# Altium PCB CH32F103R-R0-1v1.PcbDoc
Units mm, origin at the board's own origin, x right, y up, seen from the top; angles counter-clockwise.
Board outline 45.75 x 56.34 mm, 2 copper layers (TopLayer, BottomLayer); 41 components, 71 nets, 238 pads, 159 vias.
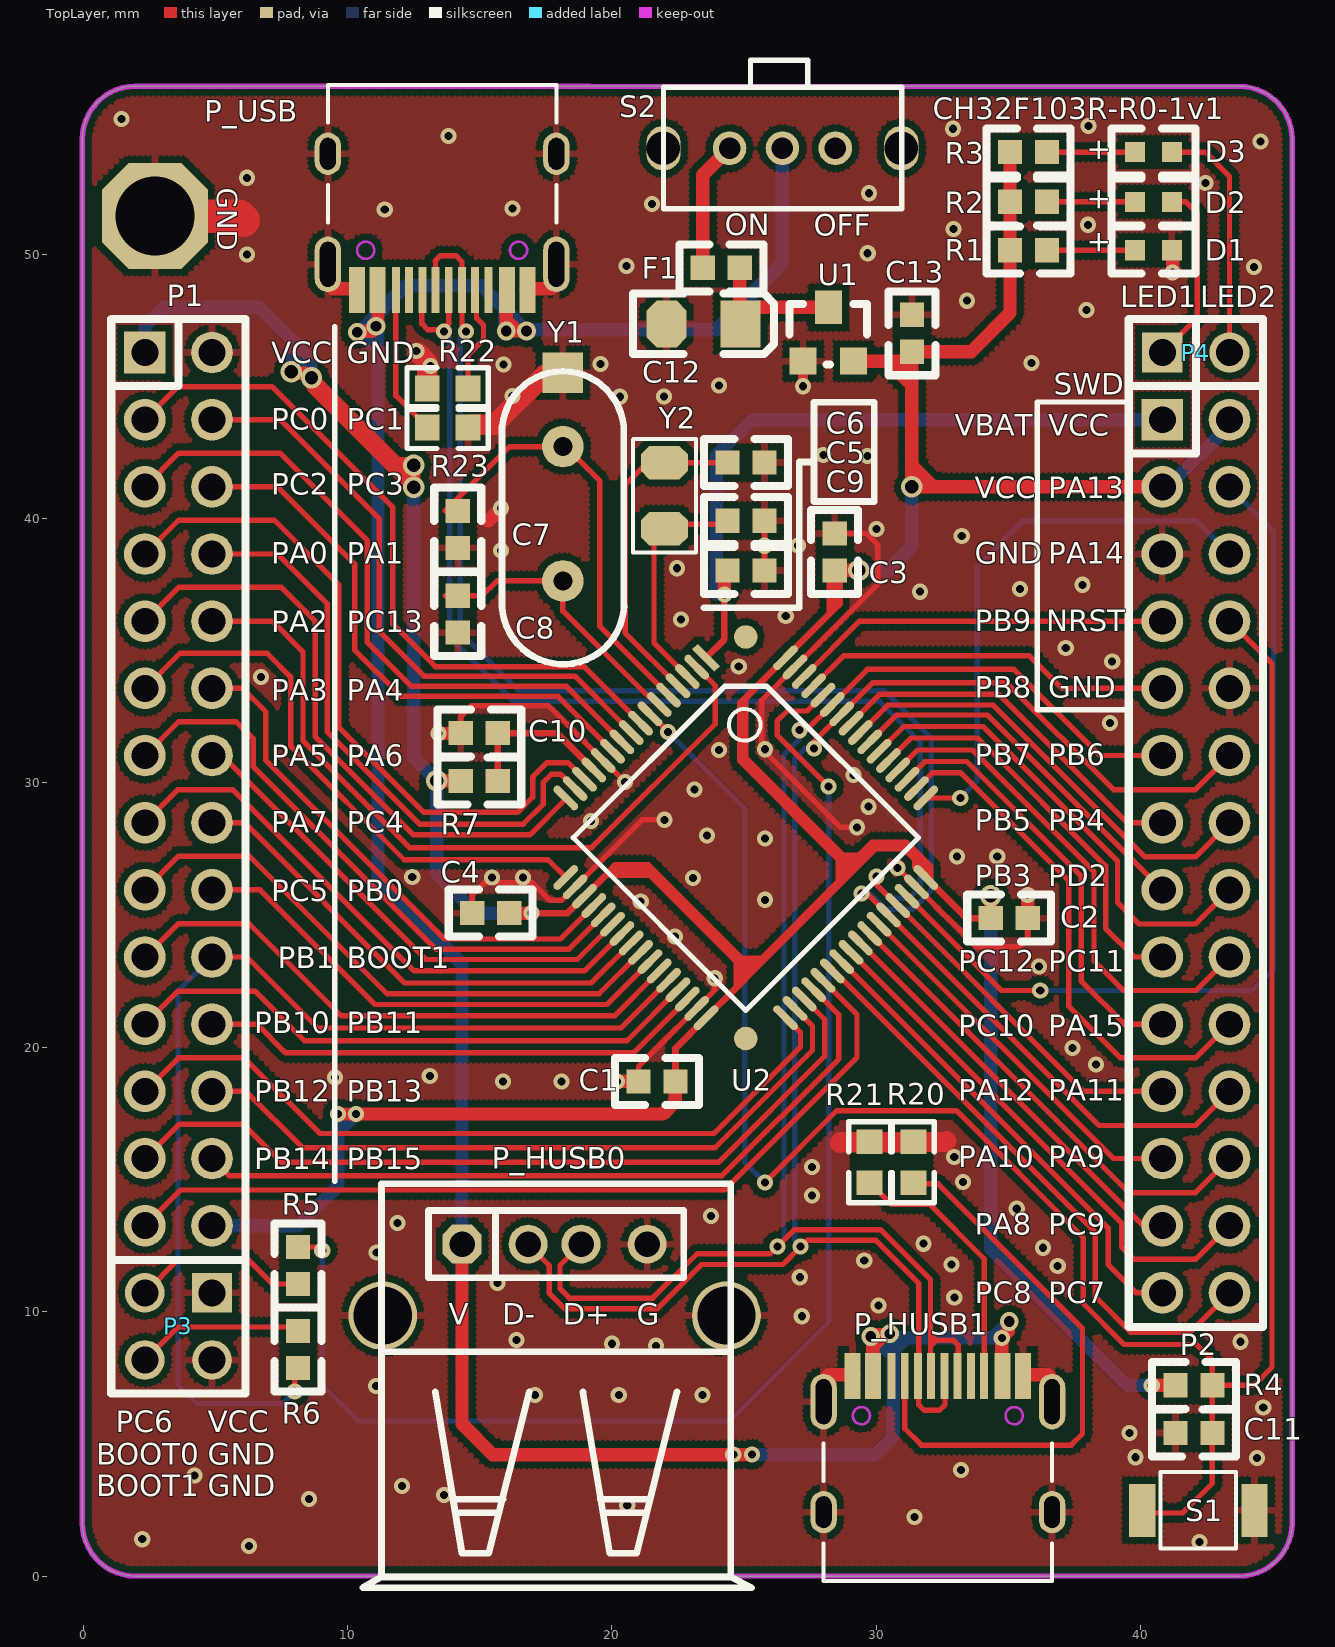
[diagram p0: TopLayer view]
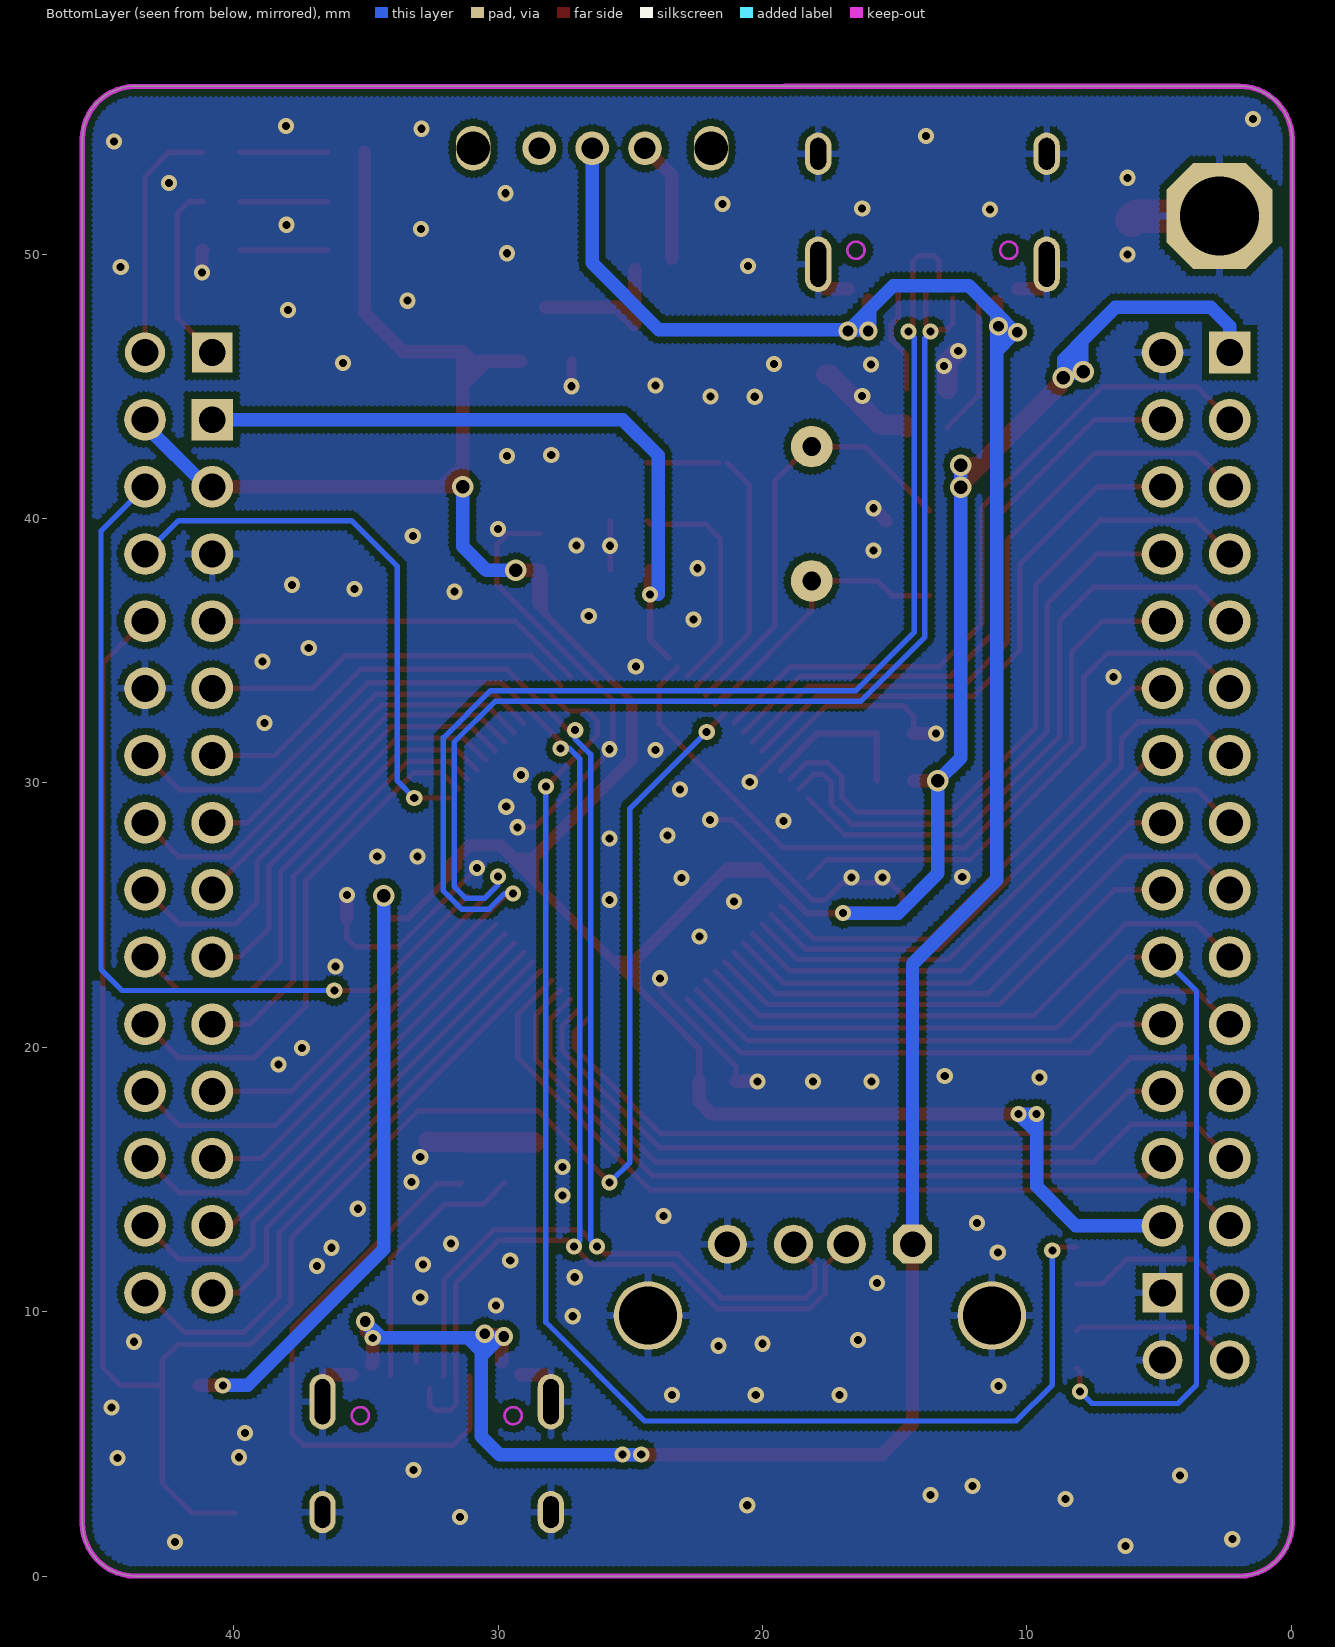
[diagram p1: BottomLayer view, seen from below]

## Layer stack, top to bottom
TopSolder: solder mask 0.0102, Solder Resist, Dk 3.5
TopLayer: signal copper 0.0356
Dielectric1: dielectric 0.32, FR-4, Dk 4.8
BottomLayer: signal copper 0.0356
BottomSolder: solder mask 0.0102, Solder Resist, Dk 3.5

## Board outline
-0.03,2.005 -0.03,54.346 cw(c1.97,54.346) 1.97,56.346 43.724,56.346 43.729,56.346 cw(c43.729,54.352) 45.723,54.352 45.723,2.005 cw(c43.723,2.005) 43.723,0.005 1.97,0.005 cw(c1.97,2.005)

## Design rules (kind name [scope] priority, off if disabled: settings)
Clearance Clearance_1 [InPolygon] p1: gap=0.254 ignorepadtopadclearanceinfootprint=FALSE
Clearance [All] p2: gap=0.152 ignorepadtopadclearanceinfootprint=FALSE
ComponentClearance [All] p1 off: gap=0.254 collisioncheckmode=3 verticalgap=0.254 showdistances=FALSE
DiffPairsRouting [All] p1: maxlimit=0.254 minlimit=0.178 mostfreqgap=0.203 toplayer_minwidth=0.152 toplayer_maxwidth=0.381 toplayer_prefwidth=0.203 bottomlayer_minwidth=0.152 bottomlayer_maxwidth=0.381 bottomlayer_prefwidth=0.203 maxuncoupledlength=12.7
MinimumSolderMaskSliver [All] p1 off: minsoldermaskwidth=0.254
PolygonConnect PolygonConnect_1 [IsVia] p1: connectstyle=Direct reliefconductorwidth=0.254 reliefentries=4 polygonreliefangle="90 Angle" airgapwidth=0.254
PolygonConnect [All] p2: connectstyle=Relief reliefconductorwidth=0.254 reliefentries=4 polygonreliefangle="90 Angle" airgapwidth=0.254
RoutingVias [All] p1: holewidth=0.406 width=0.711 viastyle="Through Hole" minholewidth=0.305 minwidth=0.61 maxholewidth=0.711 maxwidth=1.27
SilkToSilkClearance [All] p1 off: silktosilkclearance=0.254
SilkToSolderMaskClearance [IsPad] p1 off: minsilkscreentomaskgap=0.254 clearancetoexposedcopper=TRUE
SolderMaskExpansion [All] p1: expansion=0.102 istentingtop=FALSE
Width [All] p1: maxlimit=2.54 minlimit=0.152 preferedwidth=0.254
25 further rules are at their usual default settings.

## Classes and differential pairs
differential pair NewDifferentialPair2: +PA11 -PA12
differential pair NewDifferentialPair1: +PB6 -PB7

## Components (designator, comment, footprint, x,y, rotation, side; value= is the part's Value field where it differs from the comment)
C1 "0.1uF" 0603#1 21.001,18.71 r0 top value=15pF
C2 "0.1uF" 0603#1 35.721,24.885 r180 top value=15pF
C3 "0.1uF" 0603#1 28.421,39.432 r270 top value=15pF
C4 "0.1uF" 0603#1 14.715,25.073 r0 top value=15pF
C5 "12pF" 0603#1 24.369,39.914 r0 top
C6 "12pF" 0603#1 24.369,42.112 r0 top
C7 "22pF" 0603#1 14.167,38.887 r90 top
C8 "22pF" 0603#1 14.167,35.682 r90 top
C9 "0.1uF" 0603#1 24.369,38.035 r0 top value=15pF
C10 "0.1uF" 0603#1 15.68,31.88 r180 top value=15pF
C11 "0.1uF" 0603#1 41.309,5.413 r0 top
C12 "10uF" 3216 24.858,47.357 r0 top
C13 "2.2uF" 0603#1 31.344,46.304 r90 top
D1 "POWER  red" 0603L 39.776,50.145 r0 top
D2 "LED1   blue" 0603L 39.776,51.973 r0 top
D3 "LED2  blue" 0603L 39.776,53.853 r0 top
F1 "500mA" 0603#1 23.435,49.478 r0 top
P1 "Header 14X2A" IDC28A 2.333,46.274 r0 top
P2 "Header 14X2A" IDC28A 40.813,43.734 r0 top
P3 "Header 2X2" HDR2X2 4.874,10.714 r180 top
P4 "2HEAD" "SIP2 - 40mil" 40.813,46.274 r0 top
P_HUSB0 "USB_A" USBA-l 14.328,12.555 r0 top
P_HUSB1 "TYPE-C" TYPE-C-Receptacle-2.0 32.322,7.569 r0 top
P_USB "TYPE-C" TYPE-C-Receptacle-2.0 13.576,48.641 r180 top
R1 "1K" 0603#1 36.449,50.145 r180 top
R2 "1K" 0603#1 35.052,51.973 r0 top
R3 "1K" 0603#1 35.052,53.853 r0 top
R4 "10K" 0603#1 42.706,7.217 r180 top
R5 "10K" 0603#1 8.128,12.446 r270 top
R6 "10K" 0603#1 8.128,7.874 r90 top
R7 "0Ω" 0603#1 14.283,30.077 r0 top value=10K
R20 "NC(5.1K)" 0603#2 31.394,14.884 r90 top
R21 "NC(5.1K)" 0603#2 29.743,14.884 r90 top
R22 "NC(5.1K)" 0603#2 14.554,44.907 r180 top
R23 "NC(5.1K)" 0603#2 13.014,43.434 r0 top
S1 "KEY" 贴片按键 40.056,2.489 r0 top
S2 "SW" KEY2 30.446,53.999 r180 top
U1 "6219P33M" "SOT-23 - IC" 27.229,45.949 r0 top
U2 "CH32F103R" LQFP64M_10X10 23.556,34.733 r225 top locked
Y1 "8M" XT62/28 18.142,37.638 r0 top
Y2 "32.768k" FC-135 21.981,39.61 r90 top

## Footprints (in the part's own frame and the unit in brackets; to place one, negate y for a bottom-side part, rotate by r counter-clockwise, add the part's x,y. Pads: shape width x height; smd on the part's side, far side on the other; paste and mask are expansions set on the pad)
0603#1 [mil]
  rect 36x36 smd: 1(0,0) 2(55,0)
  silkscreen extent -35,-35 90,35
0603#2 [mil]
  rect 36.61x38.58 smd: 1(0,0) 2(60.63,0)
  silkscreen extent -30,-31 91,31
0603L [mil]
  rect 30x30 smd: 1(0,0) 2(55,0)
  silkscreen extent -35,-35 90,35
3216 [mil]
  rect 60x70 smd: 1(0,0)
  oct 60x70 smd: 2(-110,0)
  silkscreen extent -160,-45 50,45
FC-135 [mil]
  oct 50x70 smd: 1(0,0) 2(98.43,0)
  silkscreen extent -35,-47 133,47
HDR2X2 [mm] "Connector; Header; 2x2 Position"
  rect 1.5x1.5 hole 1.016: 1(0,0)
  round 1.5 hole 1.016: 2(0,2.54) 3(2.54,0) 4(2.54,2.54)
  silkscreen extent -1.27,-1.27 3.81,3.81
IDC28A [mil]
  rect 62x62 hole 40: 1(0,0)
  round 62 hole 40: 2(0,-100) 3(0,-200) 4(0,-300) 5(0,-400) 6(0,-500) 7(0,-600) 8(0,-700) 9(0,-800) 10(0,-900) 11(0,-1000) 12(0,-1100) 13(0,-1200) 14(0,-1300) 15(100,0) 16(100,-100) 17(100,-200) 18(100,-300) 19(100,-400) 20(100,-500) 21(100,-600) 22(100,-700) 23(100,-800) 24(100,-900) 25(100,-1000) 26(100,-1100) 27(100,-1200) 28(100,-1300)
  silkscreen extent -50,-1351 150,50
KEY2 [mm]
  oval 1.3x1.7 hole 1.27: 0(-0.5,0) 0(8.5,0)
  round 1.27 hole 0.813: 1(4,0) 2(2,0) 3(6,0)
  silkscreen extent -0.51,-3.32 8.5,2.29
LQFP64M_10X10 [mm]
  round 0.889 smd: 0(-1.619,0.508) 0(9.119,11.246)
  rect 0.3x1.2 smd: 1(0,0)
  oval 0.3x1.2 smd: 2(0.5,0) 3(1,0) 4(1.5,0) 5(2,0) 6(2.5,0) 7(3,0) 8(3.5,0) 9(4,0) 10(4.5,0) 11(5,0) 12(5.5,0) 13(6,0) 14(6.5,0) 15(7,0) 16(7.5,0) 33(7.5,11.754) 34(7,11.754) 35(6.5,11.754) 36(6,11.754) 37(5.5,11.754) 38(5,11.754) 39(4.5,11.754) 40(4,11.754) 41(3.5,11.754) 42(3,11.754) 43(2.5,11.754) 44(2,11.754) 45(1.5,11.754) 46(1,11.754) 47(0.5,11.754) 48(0,11.754)
  oval 1.2x0.3 smd: 17(9.627,2.127) 18(9.627,2.627) 19(9.627,3.127) 20(9.627,3.627) 21(9.627,4.127) 22(9.627,4.627) 23(9.627,5.127) 24(9.627,5.627) 25(9.627,6.127) 26(9.627,6.627) 27(9.627,7.127) 28(9.627,7.627) 29(9.627,8.127) 30(9.627,8.627) 31(9.627,9.127) 32(9.627,9.627) 49(-2.127,9.627) 50(-2.127,9.127) 51(-2.127,8.627) 52(-2.127,8.127) 53(-2.127,7.627) 54(-2.127,7.127) 55(-2.127,6.627) 56(-2.127,6.127) 57(-2.127,5.627) 58(-2.127,5.127) 59(-2.127,4.627) 60(-2.127,4.127) 61(-2.127,3.627) 62(-2.127,3.127) 63(-2.127,2.627) 64(-2.127,2.127)
  silkscreen extent -0.86,1.26 8.37,10.49
"SIP2 - 40mil" [mil]
  rect 60x60 hole 40: 1(0,0)
  round 60 hole 40: 2(100,0)
  silkscreen extent -50,-50 150,50
"SOT-23 - IC" [mil]
  rect 40x40 smd: 1(0,0) 2(75,0)
  rect 40x50 smd: 3(38,80)
  silkscreen extent -20,-5 95,85
TYPE-C-Receptacle-2.0 [mm]
  oval 1x1.6 hole 0.6 slot 1.2 at 90 deg: 0(-4.32,-5.15) 0(4.32,-5.15)
  oval 1x2.1 hole 0.6 slot 1.7 at 90 deg: 0(-4.32,-0.97) 0(4.32,-0.97)
  rect 0.6x1.75 smd: A1(-3.225,0) A4(-2.45,0) B1(3.225,0) B4(2.45,0)
  rect 0.3x1.75 smd: A5(-1.25,0) A6(-0.25,0) A7(0.25,0) A8(1.25,0) B5(1.75,0) B6(0.75,0) B7(-0.75,0) B8(-1.75,0)
  KeepOutLayer circle w0.1: c2.89,-1.5 r0.325
  KeepOutLayer circle w0.1: c-2.89,-1.5 r0.325
  silkscreen extent -4.32,-7.75 4.32,-2.55
USBA-l [mm]
  oct 1.473x1.473 hole 0.965: 1(0,0)
  round 1.473 hole 0.965: 2(2.5,0) 3(4.5,0) 4(7,0)
  round 2.6 hole 2.2: 5(-3,-2.7) 6(10,-2.7)
  silkscreen extent -3.75,-12.99 10.95,2.29
XT62/28 [mil]
  rect 60x60 smd: 0(0,310)
  round 62 hole 28: 1(0,0) 2(0,200)
  silkscreen extent -91,-124 91,312
贴片按键 [mm]
  rect 1x2 smd: 1(0,0) 3(4.242,0)
  silkscreen extent 0.69,-1.45 3.55,1.45

## Part data
C1 C2 C3 C4 C5 C6 C7 C8 C9 C10 C11: library part Cap, "Capacitor", LatestRevisionDate=17-Jul-2002, LatestRevisionNote="Re-released for DXP Platform.", PackageReference=RAD-0.3, Published=8-Jun-2000, Publisher="Altium Limited"
C12 C13: library part CAP, "Capacitor"
D1 D2 D3: library part LED0, "Typical INFRARED GaAs LED", LatestRevisionDate=08-Jul-2005, LatestRevisionNote="Mech Layer 1 removed.", PackageReference=LED-0, Published=8-Jun-2000, Publisher="Altium Limited"
F1: library part FUSE1, "Fuse"
P1 P2: "Header, 14-Pin, Dual row", LatestRevisionDate=17-Jul-2002, LatestRevisionNote="Re-released for DXP Platform.", Publisher="Altium Limited"
P3: "Header, 2-Pin, Dual row", LatestRevisionDate=17-Jul-2002, LatestRevisionNote="Re-released for DXP Platform.", Publisher="Altium Limited"
P_HUSB0: library part USB, "USB Port"
P_HUSB1 P_USB: library part TYPE-C1
R1 R2 R3: library part "Res Semi", "Semiconductor Resistor", LatestRevisionDate=17-Jul-2002, LatestRevisionNote="Re-released for DXP Platform.", PackageReference=AXIAL-0.5, Published=8-Jun-2000, Publisher="Altium Limited"
R4 R5 R6 R7 R20 R21 R22 R23: library part Res2, "Resistor"
  R4 R5 R6 R7: LatestRevisionDate=17-Jul-2002, LatestRevisionNote="Re-released for DXP Platform.", PackageReference=AXIAL-0.4, Published=8-Jun-2000, Publisher="Altium Limited"
U2: "ARM M3 MCU with USB device & USB host & ADC & 12bit DAC & Touch Key & CAN"
Y1 Y2: library part XTAL, "Crystal Oscillator", LatestRevisionDate=17-Jul-2002, LatestRevisionNote="Re-released for DXP Platform.", PackageReference=R38, Published=8-Jun-2000, Publisher="Altium Limited"

## Free pads (board coordinates)
  oct 4x4 hole 3: 0(2.718,51.435)

## Via types
v1: diameter 0.61, hole 0.305, TopLayer to BottomLayer, tented both sides, 144 vias
v2: diameter 0.813, hole 0.508, TopLayer to BottomLayer, tented both sides, 8 vias
v3: diameter 0.711, hole 0.406, TopLayer to BottomLayer, tented both sides, 7 vias

## Nets (pads, with @x,y where several pads share a name; then routed paths per layer and width w, separated by ;. In a path a pad name is that pad's centre, name@x,y a point inside that pad or via, vN(x,y) a via of type N, cw(c..) or ccw(c..) an arc to the next point about the centre after c; other vN are vias at no path point)
+5V: P_HUSB0.1 P_HUSB1.A4 P_HUSB1.B4 P_USB.A4 P_USB.B4 S2.1 | length 107.6
  TopLayer w0.508: v3@10.439,47.041 10.478,47.08 10.933,47.08 11.123,47.269 11.151,47.269 11.151,48.199 P_USB.B4@11.157,48.205 ; P_HUSB0.1 14.328,5.763 15.494,4.597 v1(24.587,4.597) v1(25.298,4.597) ; P_USB.A4@16.007,48.256 16.007,47.498 ; v3@16.713,47.092 v3@16.414,47.092 ; P_HUSB1.A4@29.865,8.106 29.865,8.701 ; v3(30.505,9.169) 30.467,9.131 29.984,9.131 29.955,9.101 29.883,9.101 29.865,9.084 v3@29.865,9.012 ; P_HUSB1.B4@34.792,8.005 34.741,8.056 v1(34.741,9.012) 34.988,9.258 34.988,9.588 v3(35.027,9.627) ; 16.007,47.498 v3@16.414,47.092 ; 16.007,47.498 16.007,47.097 v3(16.002,47.092) v3@16.414,47.092 ; 29.865,8.701 30.175,9.012 v3@29.865,9.012 ; 29.865,8.701 v3@29.865,9.012
  BottomLayer w0.508: P_HUSB0.1 14.328,23.148 11.151,26.326 11.151,46.33 ; v1(24.587,4.597) v1(25.298,4.597) 29.947,4.597 30.632,5.283 30.632,8.32 ; S2.1 26.446,49.661 23.927,47.142 v3@16.713,47.142 ; v3@10.439,47.041 10.494,47.041 v3@10.533,47.002 ; v3@10.439,47.041 11.151,47.752 ; v3@10.439,47.041 v3@10.478,47.002 ; v3@10.478,47.002 v3@10.533,47.002 ; v3@10.478,47.002 11.151,46.33 ; v3@10.533,47.002 10.85,46.685 11.151,46.685 ; v3@10.533,47.002 11.126,47.002 v3@11.151,46.977 ; 11.151,46.33 11.151,46.685 ; 11.151,46.685 v3@11.151,46.977 ; v3@11.151,46.977 11.151,47.269 11.151,47.752 ; 11.151,47.752 12.192,48.793 15.062,48.793 15.951,47.904 ; 15.951,47.904 v3@16.713,47.142 ; 15.951,47.904 15.951,47.142 v3@16.713,47.142 ; 30.632,8.32 30.632,8.504 31.14,9.012 ; 30.632,8.32 29.941,9.012 31.14,9.012 ; 31.14,9.012 34.412,9.012 ; 34.412,9.012 v1(34.741,9.012) 34.761,9.031 34.761,9.306 35.027,9.572 v3(35.027,9.627) 34.412,9.012
  other v3: 29.789,9.062 10.363,47.041 16.764,47.092 11.074,47.269
BOOT0: R5.1 U2.60 | length 53
  TopLayer w0.203: R5.1 8.915,12.446 v1(9.042,12.319) ; U2.60 27.378,32.718 26.628,32.718 26.247,32.337 26.247,31.804 v1(28.194,29.856)
  BottomLayer w0.203: v1(9.042,12.319) 9.042,7.233 10.408,5.867 24.46,5.867 28.194,9.601 v1(28.194,29.856)
BOOT1: P1.24 R6.1 U2.28 | length 41.7
  TopLayer w0.203: P1.24 6.188,23.414 8.873,20.729 20.339,20.729 U2.28 ; v1(8.001,6.985) 8.001,7.747 R6.1
  BottomLayer w0.203: P1.24 3.59,22.131 3.59,7.231 4.293,6.528 7.544,6.528 v1(8.001,6.985)
GND: C1.1 C2.1 C3.1 C4.1 C5.2 C6.2 C7.1 C8.1 C9.2 C10.2 C11.1 C12.2 C13.2 D1.2 P1.15 P2.3 P2.19 P3.1 P3.2 P_HUSB0.4 P_HUSB0.5 P_HUSB0.6 P_HUSB1.0 P_HUSB1.A1 P_HUSB1.B1 P_USB.0 P_USB.A1 P_USB.B1 pad.0 R20.2 R21.2 R22.2 R23.2 S1.3 U1.1 U2.12 U2.18 U2.31 U2.47 U2.63 Y1.0 | length 72.7
  TopLayer w0.203: C10.2 14.283,32.515 14.69,32.921 17.589,32.921 U2.12 v1(20.485,30.026) ; C4.1 14.715,25.759 15.172,26.216 17.001,26.216 17.661,25.555 18.094,25.555 U2.18 21.142,28.603 v1(21.979,28.603) ; C1.1 21.001,19.271 U2.31 23.884,22.154 v1(23.884,22.609) ; C9.2 C5.2 ; C3.1 29.631,39.432 30.048,39.014 30.048,37.51 U2.63 25.662,33.124 25.662,31.296 28.638,28.32 v1(29.261,28.32) v1@29.062,28.32 ; v1(30.793,26.775) 30.807,26.775 U2.47 33.777,23.804 35.403,23.804 35.721,24.122 C2.1
  TopLayer w0.381: v1(27.229,45) U1.1
  TopLayer w0.508: P_USB.0@9.232,48.895 9.439,48.688 P_USB.B1@10.357,48.688 ; v1(13.44,31.867) 14.27,31.867 C10.2 ; 15.316,39.903 v1(15.799,40.386) ; P_USB.A1@16.757,48.688 17.675,48.688 P_USB.0@17.882,48.895 ; v1(20.189,18.71) C1.1 ; P_HUSB1.0@28.016,7.417 28.223,7.624 P_HUSB1.A1@29.141,7.624 ; P_HUSB1.B1@35.541,7.624 36.459,7.624 P_HUSB1.0@36.666,7.417 ; C2.1 v1(35.721,25.759) ; D1.2@41.148,50.119 D1.2 ; v1(41.199,49.301) D1.2@41.199,50.119
  TopLayer w0.762: v1@12.649,46.279 13.014,45.914 R22.2 ; R23.2 14.554,43.459 14.638,43.543 15.552,43.543 17.45,45.441 Y1.0@17.602,45.441 ; 28.626,16.383 28.651,16.408 R21.2@29.759,16.408 ; 32.639,16.459 32.604,16.424 R20.2 ; R21.2@29.759,16.408 31.378,16.408 R20.2 ; R21.2@29.759,16.408 R21.2 R20.2
  TopLayer w1.27: pad.0 5.893,51.435 6.045,51.283
  other v1: 6.274,1.143 42.215,1.294 2.235,1.397 31.445,2.235 20.577,2.683 8.538,2.911 13.643,3.064 12.065,3.404 4.216,3.81 33.198,4.013 44.399,4.47 39.802,4.496 39.573,5.41 44.628,6.374 17.095,6.858 20.258,6.858 23.42,6.858 11.078,7.187 21.671,8.712 20,8.788 43.764,8.865 16.386,8.931 27.178,9.829 30.074,10.235 32.944,10.541 15.675,11.09 27.102,11.303 36.855,11.735 32.842,11.786 29.54,11.938 11.103,12.233 36.297,12.421 31.775,12.573 11.891,13.351 23.744,13.619 35.306,13.894 27.559,14.402 33.274,14.91 27.559,15.469 32.944,15.85 15.876,18.71 18.088,18.71 9.528,18.862 13.11,18.913 38.303,19.355 37.415,19.973 36.148,23.053 22.378,24.196 21.085,25.517 25.781,25.578 15.469,26.419 16.64,26.419 23.067,26.406 12.447,26.444 33.049,27.219 34.57,27.219 25.781,27.889 23.6,28.006 19.206,28.565 29.693,29.099 23.117,29.742 29.137,30.292 24.054,31.242 25.789,31.27 38.837,32.258 6.731,34.011 24.794,34.407 38.916,34.585 37.16,35.103 22.609,36.185 26.572,36.312 31.653,37.229 35.433,37.338 37.795,37.49 22.457,38.116 15.799,38.786 25.766,38.967 27.029,38.979 33.227,39.336 29.997,39.599 29.667,42.367 27.991,42.393 20.295,44.602 16.231,44.628 21.972,44.618 24.054,45.034 13.132,45.771 15.9,45.822 19.561,45.837 35.865,45.872 12.598,46.33 37.948,47.879 33.426,48.234 44.272,49.505 20.549,49.546 6.198,49.977 29.671,50.028 32.918,50.952 37.998,51.105 11.405,51.689 16.231,51.714 21.517,51.891 29.721,52.298 42.443,52.68 6.198,52.883 44.526,54.254 13.818,54.458 32.893,54.736 38.024,54.839 1.448,55.108
LED1: D2.2 P4.1 | length 7
  TopLayer w0.203: P4.1 42.139,47.6 42.139,51.537 41.702,51.973 D2.2
LED2: D3.2 P4.2 | length 9.2
  TopLayer w0.203: D3.2 42.438,53.853 43.353,52.939 P4.2
NetD1_1: D1.1 R1.1 | length 3.3
  TopLayer w0.203: R1.1 D1.1
NetD2_1: D2.1 R2.2 | length 3.3
  TopLayer w0.203: R2.2 D2.1
NetD3_1: D3.1 R3.2 | length 3.3
  TopLayer w0.203: R3.2 D3.1
NetF1_1: F1.1 S2.3 | length 4.6
  TopLayer w0.508: F1.1@23.435,49.834 23.435,52.989 S2.3
NetP3_3: P3.3 R5.2 | length 6.7
  TopLayer w0.203: P3.3 3.608,11.989 6.223,11.989 7.163,11.049 R5.2
NetP3_4: P3.4 R6.2 | length 6.4
  TopLayer w0.203: P3.4 3.583,9.423 7.976,9.423 R6.2
NetP_HUSB1_A5: P_HUSB1.A5 R20.1 | length 21.8
  TopLayer w0.203: P_HUSB1.A5 31.072,5.581 31.699,4.953 37.363,4.953 37.795,5.385 37.795,9.373 32.334,14.834 31.445,14.834 R20.1
NetP_HUSB1_B5: P_HUSB1.B5 R21.1 | length 10
  TopLayer w0.203: R21.1 29.768,14.884 30.132,14.521 30.132,14.496 30.556,14.072 32.004,14.072 34.072,12.004 P_HUSB1.B5
NetP_USB_A5: P_USB.A5 R22.1 | length 4.1
  TopLayer w0.203: R22.1 14.554,46.177 15.138,46.761 15.138,47.32 14.875,47.584 14.875,48.593 P_USB.A5
NetP_USB_B5: P_USB.B5 R23.1 | length 5.7
  TopLayer w0.203: P_USB.B5 11.826,44.647 13.014,43.459 R23.1
NRST: C11.2 P2.18 R4.1 S1.1 U2.7 | length 82.2
  TopLayer w0.203: U2.7 22.111,31.935 v1(22.111,31.931) ; v1(25.781,14.884) 28.499,17.602 33.02,17.602 37.821,12.802 37.821,10.312 39.37,8.763 42.112,8.763 42.706,8.169 R4.1 ; S1.1@39.954,2.388 41.581,2.388 42.706,3.513 C11.2 R4.1 ; P2.18 44.958,34.509 44.958,7.899 44.275,7.217 R4.1
  BottomLayer w0.203: v1(22.111,31.931) 25.02,29.023 25.02,15.646 v1(25.781,14.884)
PA0: P1.4 U2.14 | length 26.4
  TopLayer w0.203: P1.4 3.611,39.932 7.236,39.932 9.677,37.49 9.677,32.092 12.886,28.883 16.427,28.883 17.001,29.456 17.001,30.229 17.537,30.765 18.331,30.765 U2.14
PA1: P1.18 U2.15 | length 22.3
  TopLayer w0.203: P1.18 7.354,38.654 9.229,36.779 9.229,31.938 12.729,28.438 16.643,28.438 17.395,29.19 17.395,30.013 17.702,30.321 18.069,30.321 U2.15
PA2: P1.5 U2.16 | length 23.5
  TopLayer w0.203: P1.5 3.611,37.392 7.501,37.392 8.771,36.122 8.771,31.76 12.5,28.032 16.892,28.032 U2.16@18.271,29.411
PA3: P1.6 U2.17 | length 21.5
  TopLayer w0.203: P1.6 3.662,34.903 6.957,34.903 7.849,34.011 7.849,31.388 12.145,27.092 17.582,27.092 U2.17
PA4: P1.20 U2.20 | length 20
  TopLayer w0.203: P1.20 6.025,33.574 6.909,32.69 6.909,30.854 13.666,24.098 18.05,24.098 U2.20
PA5: P1.7 U2.21 | length 22.6
  TopLayer w0.203: P1.7 3.611,32.312 5.788,32.312 6.426,31.674 6.426,30.626 13.351,23.701 18.361,23.701 U2.21
PA6: P1.21 U2.22 | length 18.9
  TopLayer w0.203: P1.21 5.256,31.034 12.97,23.32 18.687,23.32 U2.22
PA7: P1.8 U2.23 | length 22
  TopLayer w0.203: P1.8 3.585,29.746 5.655,29.746 12.513,22.888 18.962,22.888 U2.23
PA8: P2.13 U2.41 | length 15.8
  TopLayer w0.203: U2.41 40.085,13.254 P2.13
PA9: P2.26 U2.42 | length 18.2
  TopLayer w0.203: U2.42 39.543,14.503 42.062,14.503 P2.26
PA10: P2.12 U2.43 | length 14.4
  TopLayer w0.203: U2.43 38.959,15.794 P2.12
PA11: P2.25 P_USB.A7 P_USB.B7 U2.44 | length 62.8
  TopLayer w0.203: P_USB.A7 13.326,48.968 13.326,49.711 13.307,49.73 13.513,49.936 14.097,49.936 14.326,49.707 14.326,48.965 P_USB.B7 ; P_USB.B7 14.326,47.329 14.478,47.176 v1@14.478,47.142 ; v1(29.434,25.809) 29.651,25.809 U2.44 38.417,17.043 42.062,17.043 P2.25
  BottomLayer w0.203: v1@14.453,47.041 14.267,46.855 14.267,35.684 16.464,33.487 30.288,33.487 32.07,31.705 32.07,25.918 31.379,25.227 30.339,25.227 29.757,25.809 v1(29.434,25.809)
  other v1: 14.478,47.066
PA12: P2.11 P_USB.A6 P_USB.B6 U2.45 | length 56.8
  TopLayer w0.203: P_USB.B6@12.807,48.332 12.807,47.366 13.03,47.142 v1@13.65,47.142 ; v1(13.65,47.066) 13.65,47.176 13.826,47.353 P_USB.A6 ; v1(30.006,26.457) 30.006,26.162 U2.45 37.833,18.334 P2.11
  BottomLayer w0.203: v1@13.665,47.015 13.861,46.82 13.861,35.516 16.296,33.081 30.119,33.081 31.664,31.537 31.664,26.086 31.211,25.634 30.507,25.634 30.006,26.135 v1(30.006,26.457)
PA13: P2.16 U2.46 | length 34.6
  TopLayer w0.203: U2.46 34.728,22.147 v1(36.195,22.147)
  BottomLayer w0.203: v1(36.195,22.147) 44.22,22.147 45.017,22.944 45.017,39.53 P2.16
PA14: P2.17 U2.49 | length 21.1
  TopLayer w0.203: U2.49 v1(33.171,29.43)
  BottomLayer w0.203: v1(33.171,29.43) 33.812,30.071 33.812,38.186 35.545,39.919 42.088,39.919 P2.17
PA15: P2.24 U2.50 | length 19.9
  TopLayer w0.203: U2.50 32.112,30.381 33.195,30.381 37.28,26.296 37.28,21.546 39.218,19.609 42.088,19.609 P2.24
PB0: P1.23 U2.26 | length 19
  TopLayer w0.203: P1.23 6.696,25.954 11.032,21.618 19.813,21.618 U2.26
PB1: P1.10 U2.27 | length 22.1
  TopLayer w0.203: P1.10 3.585,24.666 6.282,24.666 9.762,21.187 20.089,21.187 U2.27
PB3: P2.8 U2.55 | length 14.2
  TopLayer w0.203: U2.55 30.761,32.566 34.201,32.566 P2.8
PB4: P2.21 U2.56 | length 17.3
  TopLayer w0.203: U2.56 30.435,32.947 34.414,32.947 40.157,27.203 42.062,27.203 P2.21
PB5: P2.7 U2.57 | length 14.2
  TopLayer w0.203: U2.57 30.134,33.353 34.617,33.353 39.476,28.494 P2.7
PB6: P2.20 P_HUSB0.2 P_HUSB1.A7 P_HUSB1.B7 U2.58 | length 63.1
  TopLayer w0.203: P_HUSB0.2 17.625,11.758 17.625,10.703 18.219,10.109 21.708,10.109 23.384,11.786 26.465,11.786 27.139,12.459 27.38,12.7 29.981,12.7 31.598,11.084 31.598,7.595 P_HUSB1.B7 ; v1(27.633,31.306) 27.633,31.56 U2.58 29.859,33.785 34.925,33.785 38.967,29.743 42.062,29.743 P2.20 ; P_HUSB1.B7@31.591,7.619 31.591,7.09 31.591,6.483 31.801,6.274 32.385,6.274 32.591,6.48 P_HUSB1.A7@32.591,7.09
  BottomLayer w0.203: v1(27.127,12.471) 26.91,12.689 26.91,30.907 27.308,31.306 v1(27.633,31.306)
PB7: P2.6 P_HUSB0.3 P_HUSB1.A6 P_HUSB1.B6 U2.59 | length 60
  TopLayer w0.203: P_HUSB0.3 18.032,11.758 18.032,10.871 18.387,10.516 21.539,10.516 23.216,12.192 25.984,12.192 v1(26.264,12.471) 26.899,13.106 30.15,13.106 32.044,11.212 32.044,9.129 ; v1(27.085,31.992) 27.358,31.992 U2.59 29.66,34.293 35.201,34.293 38.46,31.034 P2.6 ; 32.044,9.169 32.044,9.129 ; P_HUSB1.A6 32.044,7.596 32.044,8.702 ; P_HUSB1.B6@33.091,8.081 33.091,8.743 32.919,8.915 32.258,8.915 ; 32.044,8.702 32.044,8.915 ; 32.044,8.702 32.258,8.915 ; 32.044,8.915 32.044,9.129 ; 32.044,8.915 32.258,8.915 ; 32.044,9.129 32.258,8.915
  BottomLayer w0.203: v1(26.264,12.471) 26.503,12.711 26.503,31.076 27.085,31.657 v1(27.085,31.992)
PB8: P2.5 U2.61 | length 14.2
  TopLayer w0.203: U2.61 28.755,34.803 35.784,34.803 37.013,33.574 P2.5
PB9: P2.4 U2.62 | length 14.4
  TopLayer w0.203: U2.62 29.359,36.114 P2.4
PB10: P1.11 U2.29 | length 22.3
  TopLayer w0.203: P1.11 3.585,22.126 6.493,22.126 8.372,20.247 20.563,20.247 U2.29
PB11: P1.25 U2.30 | length 19.3
  TopLayer w0.203: P1.25 6.577,20.874 7.661,19.79 20.813,19.79 U2.30
PB12: P1.12 U2.33 | length 29.2
  TopLayer w0.203: P1.12 3.598,19.599 6.092,19.599 8.949,16.742 23.854,16.742 27.127,20.015 27.127,20.555 U2.33
PB13: P1.26 U2.34 | length 27
  TopLayer w0.203: P1.26 6.163,18.334 8.289,16.208 23.904,16.208 27.584,19.888 27.584,20.805 U2.34
PB14: P1.13 U2.35 | length 31
  TopLayer w0.203: P1.13 3.624,17.085 6.066,17.085 7.501,15.649 24.031,15.649 28.045,19.663 28.045,21.051 U2.35
PB15: P1.27 U2.36 | length 28.8
  TopLayer w0.203: P1.27 5.524,15.143 24.16,15.143 28.578,19.561 28.578,21.225 U2.36
PC0: P1.2 U2.8 | length 27.1
  TopLayer w0.203: P1.2 3.585,44.986 7.134,44.986 11.713,40.408 11.713,36 13.318,34.395 18.944,34.395 U2.8
PC1: P1.16 U2.9 | length 23.2
  TopLayer w0.203: P1.16 7.447,43.734 11.205,39.976 11.205,35.721 12.886,34.039 18.593,34.039 U2.9
PC2: P1.3 U2.10 | length 25.3
  TopLayer w0.203: P1.3 3.611,42.472 7.439,42.472 10.748,39.163 10.748,35.314 12.404,33.658 18.267,33.658 U2.10
PC3: P1.17 U2.11 | length 21.2
  TopLayer w0.203: P1.17 7.345,41.194 10.27,38.269 10.27,35.03 12.023,33.277 17.941,33.277 U2.11
PC4: P1.22 U2.24 | length 19
  TopLayer w0.203: P1.22 6.094,28.494 12.157,22.431 19.212,22.431 U2.24
PC5: P1.9 U2.25 | length 22.1
  TopLayer w0.203: P1.9 3.611,27.232 6.282,27.232 11.489,22.025 19.513,22.025 U2.25
PC6: P1.14 U2.37 | length 33
  TopLayer w0.203: P1.14 3.684,14.605 24.257,14.605 29.264,19.612 29.264,21.246 U2.37
PC7: P2.28 U2.38 | length 22.7
  TopLayer w0.203: U2.38 28.394,22.886 38.278,13.003 38.278,10.566 39.624,9.22 41.859,9.22 P2.28
PC8: P2.14 U2.39 | length 18.1
  TopLayer w0.203: U2.39 38.76,13.164 38.76,11.786 39.832,10.714 P2.14
PC9: P2.27 U2.40 | length 20.2
  TopLayer w0.203: U2.40 39.268,13.363 39.268,12.446 39.726,11.989 42.088,11.989 P2.27
PC10: P2.10 U2.51 | length 16.4
  TopLayer w0.203: U2.51 31.833,30.81 33.417,30.81 37.744,26.483 37.744,22.504 39.375,20.874 P2.10
PC11: P2.23 U2.52 | length 19.1
  TopLayer w0.203: U2.52 31.558,31.242 33.63,31.242 38.228,26.644 38.228,23.266 39.345,22.149 42.088,22.149 P2.23
PC12: P2.9 U2.53 | length 15.5
  TopLayer w0.203: U2.53 31.308,31.699 33.833,31.699 38.67,26.862 38.67,24.5 39.756,23.414 P2.9
PC13: P1.19 U2.2 | length 28.9
  TopLayer w0.203: P1.19 7.154,36.114 8.314,34.953 8.314,31.583 12.348,27.549 19.231,27.549 23.905,32.223 23.905,33.677 U2.2
PC14: C5.1 U2.3 Y2.1 | length 8.8
  TopLayer w0.203: U2.3 21.59,35.284 21.59,39.219 22.148,39.776 24.231,39.776 C5.1
PC15: C6.1 U2.4 Y2.2 | length 12.2
  TopLayer w0.203: Y2.2@21.346,42.11 20.498,41.261 20.498,35.67 U2.4 ; Y2.2@21.651,42.11 C6.1@24.24,42.11 ; C6.1@24.367,42.11 C6.1
PD0: C7.2 U2.5 Y1.2 | length 15.9
  TopLayer w0.203: 13.685,40.284 16.118,42.718 Y1.2@17.507,42.718 ; Y1.2 18.242,42.718 19.533,41.427 19.533,35.928 U2.5
PD1: C8.2 U2.6 Y1.1 | length 10.7
  TopLayer w0.203: 13.685,37.079 15.091,37.079 15.65,37.638 17.509,37.638 Y1.1@17.797,37.35 ; Y1.1 18.142,36.493 21.334,33.302 21.451,33.302 U2.6
PD2: P2.22 U2.54 | length 18.2
  TopLayer w0.203: U2.54 31.033,32.131 34.036,32.131 39.116,27.051 39.116,25.476 39.929,24.663 42.062,24.663 P2.22
V5V: C12.1 F1.2 U1.3 | length 5.7
  TopLayer w0.508: F1.2@24.832,49.403 24.832,47.357 24.858,47.332 25.506,47.981 U1.3
VBAT: C9.1 P2.1 U2.1 | length 26.9
  TopLayer w0.254: U2.1 24.25,35.427 v1(24.25,37.128) C9.1@24.25,37.776 ; C9.1 C9.1@24.377,38.026
  TopLayer w0.508: v1(24.25,37.128) C9.1@24.25,38.026
  BottomLayer w0.508: v1@23.945,37.128 23.945,42.386 25.294,43.734 P2.1
VCC: C1.2 C2.2 C3.2 C4.2 C13.1 P1.1 P1.28 P2.2 P2.15 R1.2 R2.1 R3.1 R4.2 R7.1 U1.2 U2.19 U2.32 U2.48 U2.64 | length 215.6
  TopLayer w0.254: v1(16.95,25.073) 18.318,25.073 U2.19 19.766,26.521 ; C1.2@22.411,18.659 22.411,18.71 22.398,18.723 22.398,19.961 U2.32 24.723,22.285 ; C2.2 33.404,24.885 U2.48@32.038,26.251 ; 19.766,26.521 21.452,26.521 24.723,23.25 ; 19.766,26.521 19.918,26.673 ; 19.918,26.673 20.118,26.873 21.373,26.873 21.573,26.673 ; 19.918,26.673 21.573,26.673 ; 21.573,26.673 24.9,23.346 ; 24.723,22.285 24.723,23.25 ; 24.723,22.285 24.91,22.472 ; 24.723,23.25 24.91,23.063 ; 24.85,32.312 25.027,32.134 ; 24.85,32.312 24.85,33.019 25.027,33.196 ; 24.85,32.312 24.85,30.839 28.583,27.105 ; 24.9,23.346 25.662,23.346 ; 24.9,23.346 25.053,23.193 ; 24.91,22.472 24.91,23.063 ; 24.91,22.472 25.205,22.768 ; 24.91,23.063 25.205,22.768 ; 25.027,32.134 25.027,33.196 ; 25.027,32.134 25.027,30.94 28.733,27.235 ; 25.027,33.196 U2.64 28.245,36.414 ; 25.053,23.193 25.51,23.193 ; 25.053,23.193 25.272,22.974 25.272,22.955 25.51,23.193 ; 25.205,22.768 28.78,26.343 ; 25.51,23.193 25.662,23.346 ; 25.662,23.346 28.583,26.267 ; 28.245,36.414 28.421,36.59 ; 28.245,36.414 28.245,37.859 C3.2 ; 28.421,36.59 28.6,36.769 28.6,37.855 28.422,38.034 C3.2 ; 28.421,36.59 C3.2 ; 28.583,26.267 28.583,27.105 ; 28.583,26.267 28.78,26.464 ; 28.583,27.105 28.78,26.908 ; 28.733,27.235 28.78,27.187 ; 28.733,27.235 29.348,27.235 ; 28.78,26.343 28.78,26.464 ; 28.78,26.343 29.037,26.6 ; 28.78,26.464 28.78,26.857 ; 28.78,26.464 28.977,26.66 ; 28.78,26.857 28.977,26.66 ; 28.78,26.857 28.977,26.66 ; 28.78,26.857 28.78,26.908 ; 28.78,26.908 28.78,27.187 ; 28.78,27.187 28.958,27.009 ; 28.958,27.009 29.326,27.009 ; 28.958,27.009 28.977,26.991 28.977,26.66 ; 28.977,26.66 29.037,26.6 ; 28.977,26.66 29.326,27.009 ; 29.037,26.6 29.447,27.009 ; 29.326,27.009 29.447,27.009 ; 29.326,27.009 29.447,27.13 29.447,27.009 ; 29.348,27.235 29.853,27.74 31.123,27.74 31.327,27.537 ; 29.348,27.235 29.673,27.235 ; 29.447,27.009 29.673,27.235 ; 29.673,27.235 29.974,27.537 31.047,27.537 ; 31.047,27.537 31.479,27.105 ; 31.047,27.537 31.327,27.537 ; 31.327,27.537 32.038,26.825 32.038,26.592 ; 31.479,27.105 31.479,26.81 U2.48 ; 31.479,27.105 31.867,26.717 U2.48 ; U2.48 32.038,26.592 ; U2.48 U2.48@32.038,26.251 ; U2.48@32.038,26.251 32.038,26.592
  TopLayer w0.508: v2(7.874,45.542) 7.932,45.484 8.383,45.484 v2@8.694,45.173 ; v2(8.636,45.314) v2@8.694,45.255 ; v1(9.635,17.478) v1(10.321,17.478) 21.929,17.478 22.398,17.948 C1.2 ; 12.09,41.605 v2(12.497,42.012) ; v2(13.369,30.077) R7.1 ; C4.2 v1(16.95,25.073) ; C1.2@22.411,18.545 C1.2@22.411,18.659 ; C3.2@28.422,38.034 v2@29.256,38.034 ; U1.2 30.429,45.949 ; v2@29.255,38.035 v2@29.256,38.034 ; v2(29.333,38.034) v2@29.256,38.034 ; v2@31.342,41.194 32.14,41.194 ; v2(31.344,41.196) 31.344,41.991 ; C2.2 v2(34.324,25.733) ; R3.1 R2.1 R1.2 35.052,47.776 33.58,46.304 C13.1 ; v1(40.411,7.214) 41.306,7.214 R4.2 ; P2.2 32.14,41.194 ; v2@8.694,45.173 8.694,44.976 11.659,42.012 ; v2@8.694,45.173 8.985,44.882 9.068,44.882 ; v2@8.694,45.173 v2@8.694,45.255 ; v2@8.694,45.255 9.068,44.882 ; 9.068,44.882 11.88,42.07 12.438,42.07 v2(12.497,42.012) ; 11.659,42.012 v2(12.497,41.173) v2(12.497,42.012) ; 11.659,42.012 v2(12.497,42.012) ; 30.429,45.949 31.344,45.034 ; 30.429,45.949 C13.1@30.886,45.949 ; C13.1@30.886,45.949 31.344,45.491 ; C13.1@30.886,45.949 30.988,45.949 C13.1 ; 31.344,41.991 32.14,41.194 ; 31.344,41.991 31.344,45.034 ; 31.344,45.034 31.344,45.491 ; 31.344,45.491 C13.1
  BottomLayer w0.508: P1.1 2.333,47.266 3.048,47.981 6.655,47.981 7.925,46.711 ; P1.28 8.149,13.254 9.635,14.74 9.635,16.792 ; v2(12.497,42.012) v2(12.497,41.173) 12.497,30.949 v2(13.369,30.077) 13.369,26.571 14.867,25.073 v1(16.95,25.073) ; v2(29.333,38.034) 30.439,38.034 31.344,38.938 v2(31.344,41.196) ; v2(34.324,25.733) 34.324,12.361 39.472,7.214 v1(40.411,7.214) ; P2.2 41.02,41.194 43.353,43.527 P2.15 ; 7.925,46.711 8.42,46.215 ; 7.925,46.711 7.925,45.593 v2(7.874,45.542) 7.932,45.484 v2@8.383,45.484 ; v2@8.383,45.484 8.42,45.521 8.42,46.215 ; v2@8.383,45.484 8.554,45.314 v2(8.636,45.314) 8.612,45.338 8.612,46.024 8.42,46.215 ; 9.635,16.792 v1(10.321,17.478) v1(9.635,17.478) 9.635,16.792
VDDA: C10.1 R7.2 U2.13 | length 6
  TopLayer w0.254: R7.2 C10.1 17.923,31.88 U2.13
pads on no net: P_HUSB1.A8 P_HUSB1.B8 P_USB.A8 P_USB.B8 S2.0 S2.2 U2.0

## Polygon pours and split planes (outlines as drawn)
GND on TopLayer "Top Layer-No Net" (hatched 90Degree grid 0.203 track 0.203, remove dead copper, pour order 4): -0.244,56.632 44.491,56.632 45.725,55.397 45.857,55.265 45.857,53.147 45.857,1.082 45.09,0.315 44.668,-0.107 41.209,-0.107 1.031,-0.107 0.117,0.808 -0.147,1.072 -0.147,2.565 -0.147,56.52 -0.259,56.632
GND on BottomLayer "Top Layer-No Net" (hatched 90Degree grid 0.203 track 0.203, remove dead copper, pour order 6): -0.33,56.53 44.491,56.53 45.669,55.352 45.872,55.148 45.872,53.807 45.872,1.123 45.136,0.386 44.582,-0.168 40.366,-0.168 1.285,-0.168 -0.122,1.24 -0.208,1.326 -0.208,3.297 -0.208,56.393 -0.33,56.515

## Keep-outs
KeepOutLayer:
  lines w0.203: 19.17,56.335 43.723,56.335 cw(c43.729,54.34) 45.723,54.346 45.723,2.005 cw(c43.723,2.005) 43.723,0.005 38.175,0.005 1.97,0.005 cw(c1.97,2.005) -0.03,2.005 -0.03,54.346 cw(c1.97,54.346) 1.97,56.346 19.17,56.346

## Silkscreen, mask and mechanical layers (free items; w line width, h text height)
TopOverlay:
  lines w0.203: 9.52,14.94 9.52,47.249 ; 39.543,32.771 36.088,32.771 36.088,44.404 39.568,44.404
  lines w0.254: 23.47,36.627 27.076,36.627 27.076,42.139 27.559,42.139 ; 27.635,40.64 29.667,40.64 29.921,40.64 29.921,44.399 29.616,44.399 27.635,44.399 27.635,43.637 27.635,40.64
  text "CH32F103R-R0-1v1" at 32.131,55.093 h0.81
  text "GND" at 5.073,52.501 h0.76 r270
  text "ON" at 24.269,50.719 h0.81
  text "OFF" at 27.639,50.689 h0.81
  text "LED1" at 39.218,47.981 h0.81
  text "LED2" at 42.24,47.981 h0.81
  text "VCC" at 7.107,45.877 h0.81
  text "GND" at 9.977,45.877 h0.81
  text "SWD" at 36.703,44.679 h0.81
  text "PC0" at 7.107,43.362 h0.81
  text "PC1" at 9.977,43.362 h0.81
  text "VBAT" at 32.964,43.134 h0.81
  text "VCC" at 36.495,43.134 h0.81
  text "PC2" at 7.107,40.899 h0.81
  text "PC3" at 9.977,40.899 h0.81
  text "VCC" at 33.726,40.772 h0.81
  text "PA13" at 36.495,40.772 h0.81
  text "PA0" at 7.107,38.282 h0.81
  text "PA1" at 9.977,38.282 h0.81
  text "GND" at 33.726,38.282 h0.81
  text "PA14" at 36.495,38.282 h0.81
  text "PB9" at 33.726,35.742 h0.81
  text "NRST" at 36.419,35.742 h0.81
  text "PA2" at 7.107,35.692 h0.81
  text "PC13" at 9.977,35.692 h0.81
  text "PB8" at 33.726,33.228 h0.81
  text "GND" at 36.495,33.228 h0.81
  text "PA3" at 7.107,33.101 h0.81
  text "PA4" at 9.977,33.101 h0.81
  text "PB7" at 33.726,30.662 h0.81
  text "PB6" at 36.495,30.662 h0.81
  text "PA5" at 7.107,30.637 h0.81
  text "PA6" at 9.977,30.637 h0.81
  text "PB5" at 33.726,28.199 h0.81
  text "PB4" at 36.495,28.199 h0.81
  text "PA7" at 7.107,28.122 h0.81
  text "PC4" at 9.977,28.122 h0.81
  text "PB3" at 33.726,26.09 h0.81
  text "PD2" at 36.495,26.09 h0.81
  text "PC5" at 7.107,25.532 h0.81
  text "PB0" at 9.977,25.532 h0.81
  text "PB1" at 7.361,22.992 h0.81
  text "BOOT1" at 9.977,22.992 h0.81
  text "PC12" at 33.091,22.865 h0.81
  text "PC11" at 36.495,22.865 h0.81
  text "PB10" at 6.472,20.528 h0.81
  text "PB11" at 9.977,20.528 h0.81
  text "PC10" at 33.091,20.426 h0.81
  text "PA15" at 36.495,20.426 h0.81
  text "PA12" at 33.091,17.988 h0.81
  text "PA11" at 36.495,17.988 h0.81
  text "PB12" at 6.472,17.937 h0.81
  text "PB13" at 9.977,17.937 h0.81
  text "PA10" at 33.091,15.473 h0.81
  text "PA9" at 36.495,15.473 h0.81
  text "PB14" at 6.472,15.397 h0.81
  text "PB15" at 9.977,15.397 h0.81
  text "PA8" at 33.726,12.908 h0.81
  text "PC9" at 36.495,12.908 h0.81
  text "PC8" at 33.726,10.317 h0.81
  text "PC7" at 36.495,10.317 h0.81
  text "PC6" at 1.239,5.44 h0.81
  text "VCC" at 4.714,5.44 h0.81
  text "BOOT0" at 0.5,4.211 h0.81
  text "GND" at 4.714,4.211 h0.81
  text "BOOT1" at 0.5,3.025 h0.81
  text "GND" at 4.714,3.025 h0.81
Mechanical1:
  lines w0.203: 43.724,56.346 1.97,56.346 ccw(c1.97,54.346) -0.03,54.346 -0.03,2.005 ccw(c1.97,2.005) 1.97,0.005 43.723,0.005 ccw(c43.723,2.005) 45.723,2.005 45.723,54.352 ccw(c43.729,54.352) 43.729,56.346

## Text inside footprints (layer, text, board x,y; h text height)
D1: TopOverlay "+" at 38.76,49.967 h0.81 r90
D2: TopOverlay "+" at 38.76,51.592 h0.81 r90
D3: TopOverlay "+" at 38.76,53.472 h0.81 r90
P_HUSB0: TopOverlay "D-" at 15.852,9.507 h0.81; TopOverlay "D+" at 18.138,9.507 h0.81; TopOverlay "V" at 13.82,9.507 h0.81; TopOverlay "G" at 20.932,9.507 h0.81